# EAGLE board bat_mini3 (EAGLE 9.0.0)
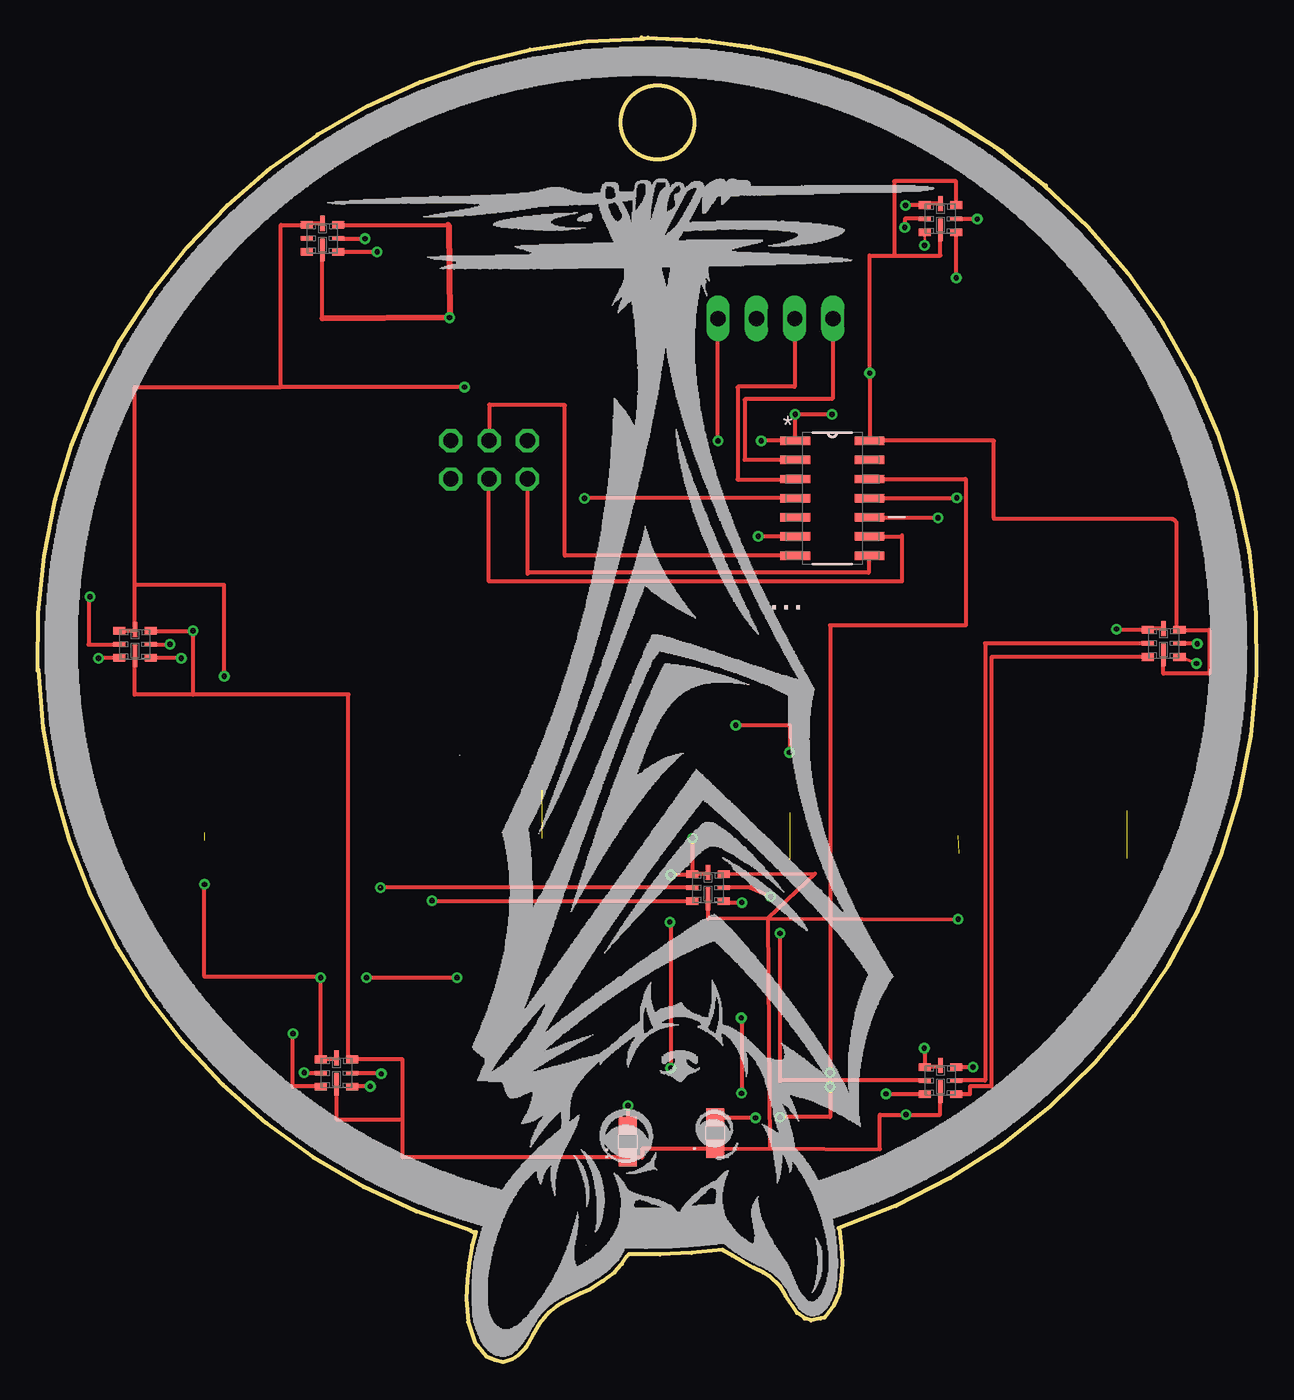
[diagram p0: board, top side]
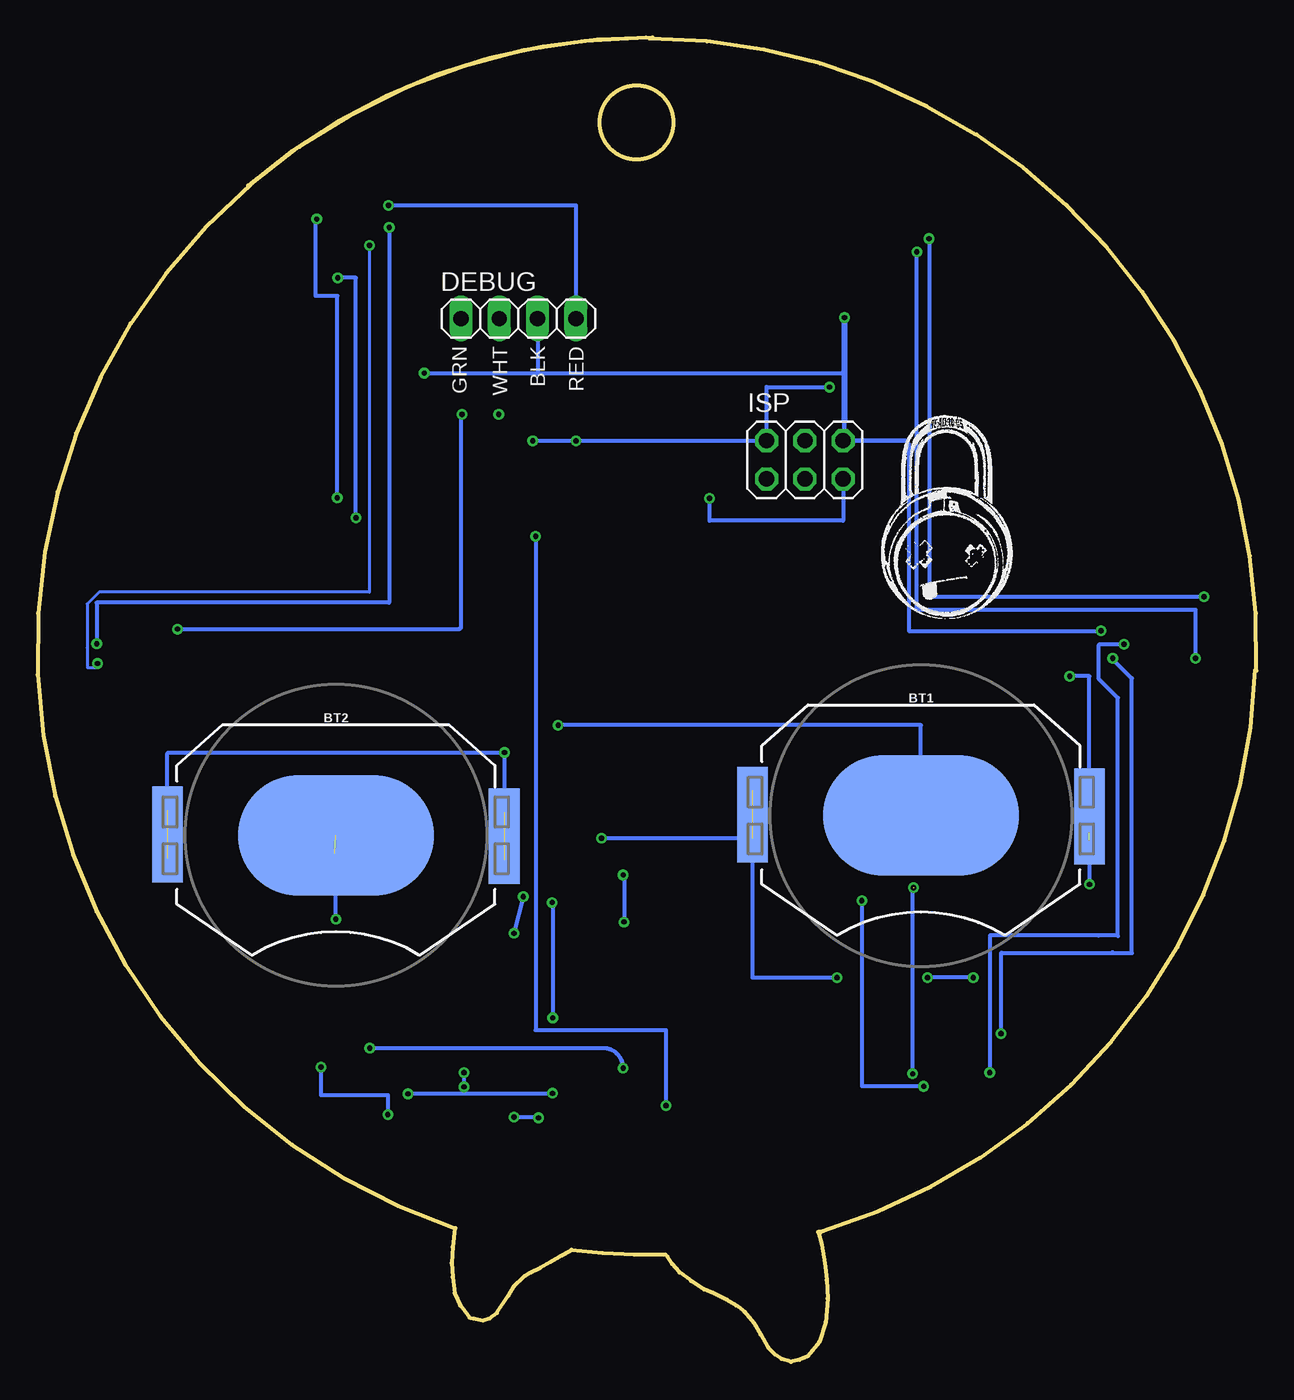
[diagram p1: board, bottom side, seen from below]

Size 80.84 x 87.88 mm. Coordinates in mm from the lower left corner, seen from the top.
Outline: 40.5,87.88 arc-161 53.12,8.88
Outline: 40.06,87.88 arc-41 66.88,78.06
Outline: 0,45.88 arc-92 40.25,87.81
Outline: 28.75,8.69 arc-71 0.06,45.94
Outline: 45.44,7.44 arc-9 39.19,7.13
Outline: 28.88,8.63 29.06,8.63 28.81,7.75 28.62,6.56 28.5,5.44 28.44,4.19 28.56,2.63 29,1.31 29.75,0.38 30.31,0.13 30.88,0 31.5,0.19 31.94,0.5 32.38,0.94 32.88,1.81 33.31,2.56 33.94,3.31 34.5,3.75 35.12,4.13 36,4.56 36.62,4.81 37.5,5.38 38.25,5.94 38.75,6.5 39.06,7
Outline: 53.19,8.88 53.31,7.63 53.38,6.56 53.31,5.63 53.19,4.56 52.81,3.75 52.19,2.94 51.94,2.88 51.31,2.75 50.88,2.88 50.38,3.25 49.62,4.38 49.25,5 48.56,5.69 48.12,5.94 47.5,6.25 46.81,6.63 46.06,7.06 45.5,7.38
Outline: circle at 41.12,82.25 radius 2.44
Copper layers (1*16): Top 0.0356mm / dielectric 1.5011mm / Bottom 0.0356mm
Design rules "osh": minimum track width 6mil, minimum drill 13mil, track to track 6mil, track to pad 6mil, pad to pad 6mil, via to via 6mil, smd to smd 6mil, copper to edge 15mil, drill to drill 6mil, minimum pad ring 7mil, minimum via ring 7mil, stop-mask expansion 4mil, vias tented up to drill 0mil, thermal gap 10mil

## Footprints (pad centres in the part's own frame; a part is rotated, then mirrored left to right if it is on the bottom)
CHIP-LED0805 = smd 1.2 x 1.2: A 0,-1.05; C 0,1.05
SOIC127P600X175-14N = smd 1.981 x 0.559: 1 -2.464,3.81; 2 -2.464,2.54; 3 -2.464,1.27; 4 -2.464,0; 5 -2.464,-1.27; 6 -2.464,-2.54; 7 -2.464,-3.81; 8 2.464,-3.81; 9 2.464,-2.54; 10 2.464,-1.27; 11 2.464,0; 12 2.464,1.27; 13 2.464,2.54; 14 2.464,3.81
BATTCON_20MM_4LEGS = smd 13 x 8: NEGATIVE 0,0 | smd 2.032 x 3.175: POSITIVE@1 -11.176,1.651; POSITIVE@2 -11.176,-1.524; POSITIVE@3 11.176,1.524; POSITIVE@4 11.176,-1.651
1X04 = drill 1.016 long: 1 -3.81,0; 2 -1.27,0; 3 1.27,0; 4 3.81,0
2X03 = drill 1.016 octagon: 1 -2.54,-1.27; 2 -2.54,1.27; 3 0,-1.27; 4 0,1.27; 5 2.54,-1.27; 6 2.54,1.27
APA102-2020 = smd 0.8 x 0.5: 1_VDD -1.05,0.9; 3_SDO -1.05,-0.9; 4_SDI 1.05,-0.9; 6_GND 1.05,0.9 | smd 0.8 x 0.3: 2_CKO -1.05,0; 5_CKI 1.05,0 | smd 0.3 x 1.5: GNDPAD 0,-0.75 | smd 0.3 x 1: VDDPAD 0,1

## Placement (x,y rotation side)
.  .  [CHIP-LED0805]  44.95,15.17 0 top
..  ..  [CHIP-LED0805]  39.13,14.61 0 top
...  ATTINY84-20SSU  [SOIC127P600X175-14N]  52.72,57.31 0 top
BT1  [BATTCON_20MM_4LEGS]  22.25,36.25 0 bottom
BT2  [BATTCON_20MM_4LEGS]  61.06,34.94 0 bottom
DEBUG  [1X04]  48.95,69.23 0 bottom
ISP  .  [2X03]  29.95,59.86 0 bottom
ONE  APA102  [APA102-2020]  59.88,75.86 0 top
THREE  APA102  [APA102-2020]  59.88,18.67 0 top
TWO  APA102  [APA102-2020]  74.7,47.67 0 top
U$5  APA102  [APA102-2020]  44.47,31.47 0 top
U$6  APA102  [APA102-2020]  19.82,19.17 0 top
U$7  APA102  [APA102-2020]  6.45,47.61 0 top
U$8  APA102  [APA102-2020]  18.89,74.55 0 top

## Library data of the parts
. .. = led
... = Atmel_By_element14_Batch_1-00; OC_FARNELL: 1636955; OC_NEWARK: 03P2040; PACKAGE: SOIC-14; SUPPLIER: Atmel
BT1 BT2 = SF_Batteries; PROD_ID: BATT-10373; SF_SKU: PRT-11892
DEBUG ISP = pinhead
ONE THREE TWO U$5-U$8 = pimoroni-optoelectronics

## Nets
GND: ....14 ...A ..A BT2.NEGATIVE DEBUG.3 ISP.6 ONE.6_GND ONE.GNDPAD THREE.6_GND THREE.GNDPAD TWO.6_GND TWO.GNDPAD U$5.6_GND U$5.GNDPAD U$6.6_GND U$6.GNDPAD U$7.6_GND U$7.GNDPAD U$8.6_GND U$8.GNDPAD
N$1: ....2 DEBUG.1
N$3: ....8 ISP.1
N$4: ....7 ISP.4
N$5: ....9 ISP.3
N$6: ....4 ISP.5
N$7: ....12 ..C
N$8: ....6 ...C
N$9: ....11 ONE.5_CKI
N$10: ....10 ONE.4_SDI
N$11: ONE.3_SDO TWO.4_SDI
N$12: ONE.2_CKO TWO.5_CKI
N$13: THREE.4_SDI TWO.3_SDO
N$14: THREE.5_CKI TWO.2_CKO
N$15: ....3 DEBUG.2
N$16: THREE.3_SDO U$5.4_SDI
N$17: THREE.2_CKO U$5.5_CKI
N$18: U$5.3_SDO U$6.4_SDI
N$19: U$5.2_CKO U$6.5_CKI
N$20: U$6.2_CKO U$7.5_CKI
N$21: U$6.3_SDO U$7.4_SDI
N$22: U$7.3_SDO U$8.4_SDI
N$23: U$7.2_CKO U$8.5_CKI
N$24: BT1.NEGATIVE BT2.POSITIVE@1 BT2.POSITIVE@2 BT2.POSITIVE@3 BT2.POSITIVE@4
VCC: ....1 BT1.POSITIVE@1 BT1.POSITIVE@2 BT1.POSITIVE@3 BT1.POSITIVE@4 DEBUG.4 ISP.2 ONE.1_VDD ONE.VDDPAD THREE.1_VDD THREE.VDDPAD TWO.1_VDD TWO.VDDPAD U$5.1_VDD U$5.VDDPAD U$6.1_VDD U$6.VDDPAD U$7.1_VDD U$7.VDDPAD U$8.1_VDD U$8.VDDPAD

## Tracks (layer width: path | path; a pad name or v marks a point on that pad's centre or on a via)
GND  (via drill 0.35)  (1 unrouted)
  Top 0.254: 18.89,69.23 U$8.GNDPAD | U$8.6_GND 27.23,75.45 | 55.18,65.6 v55.2,65.61 | v55.2,65.61 55.2,73.42 56.81,73.42 | 56.81,73.42 59.88,73.42 ONE.GNDPAD | ONE.6_GND 60.94,78.34 56.81,78.34 56.81,73.42 | TWO.GNDPAD 74.68,46.92 74.68,45.67 77.7,45.67 77.7,48.57 TWO.6_GND arc-90 75.56,48.76 75.56,55.56 arc90 75.19,55.94 63.5,55.94 arc-90 63.44,56 63.44,61.13 arc-90 63.44,61.12 ....14 55.18,65.6 | 24.21,16.1 24.21,13.56 ...A 40.09,13.54 40.09,14.12 ..A 48.55,14.18 | 24.21,16.1 24.21,20.07 U$6.6_GND U$6.6_GND arc-90 20.61,20.33 20.61,44.3 arc-90 20.59,44.28 10.3,44.28 | U$6.GNDPAD 19.82,16.1 24.21,16.1 | U$7.6_GND v10.3,48.51 10.3,44.28 | 10.3,44.28 6.43,44.28 6.43,46.86 U$7.GNDPAD | U$5.6_GND 51.57,32.41 48.45,29.43 | 48.45,29.43 44.47,29.4 U$5.GNDPAD | 48.55,14.18 55.87,14.1 55.87,16.4 v57.61,16.4 59.87,16.4 THREE.GNDPAD | 48.45,29.43 48.55,14.18 | THREE.6_GND v62.05,19.56 | v55.2,65.61 arc90 55.18,65.6 | 48.45,29.43 61.05,29.36 v61.06,29.38
  Top 0.406: 27.23,75.45 27.26,75.42 v27.32,69.3 18.89,69.23
  Bottom 0.254: 47.68,65.63 47.7,65.61 27.51,65.61 27.32,65.8 | v55.2,65.61 55.18,65.63 47.68,65.63 | v10.3,48.51 v10.31,48.5 23.04,48.5 23.04,60.88 23.29,61.13 | DEBUG.3 47.68,65.63 | v62.05,19.56 62.05,17.7 57.61,17.7 v57.61,16.4 | v61.06,29.38 61.06,33.69 61.12,33.75
  Bottom 0.305: 27.32,62.48 27.32,61.13 ISP.6 23.29,61.13
  Bottom 0.406: v27.32,69.3 27.32,65.8 27.32,62.48
N$1
  Top 0.254: DEBUG.1 52.76,63.97 52.69,63.9 46.95,63.9 46.89,63.84 46.89,59.86 50.25,59.86 ....2
N$2
  Top 0.254: 55.17,65.62 55.21,65.66
N$3
  Top 0.254: ....8 55.12,53.5 55.12,52.37 32.5,52.37 | 32.5,52.37 32.5,52.3 | 32.5,52.37 32.5,58.59 ISP.1
N$4
  Top 0.254: ....7 34.97,53.5 34.97,63.48 29.96,63.48 | 29.96,63.48 29.96,63.55 | 29.96,63.48 29.96,61.13 ISP.4
N$5
  Top 0.254: ....9 57.33,54.77 | 57.33,54.77 57.33,54.84 | 57.33,54.77 57.33,51.78 29.93,51.78 29.93,58.59 ISP.3
N$6  (via drill 0.35)
  Top 0.254: ....4 v36.27,57.31
  Bottom 0.254: v36.27,57.31 36.27,55.81 27.41,55.81 ISP.5
N$7  (via drill 0.35)
  Top 0.254: ....12 61.56,58.58 61.56,48.88 52.56,48.88 v52.56,19.19 | v52.56,18.25 52.56,16.25 v49.25,16.25 | v47.62,16.19 44.95,16.19 ..C
  Bottom 0.254: v52.56,19.19 v52.56,18.25 | v49.25,16.25 47.62,16.25 v47.62,16.19
N$8  (via drill 0.35)
  Top 0.254: ....6 v47.8,54.77 | v39.16,17.01 39.16,15.66 ...C
  Bottom 0.254: v47.8,54.77 47.8,22.02 39.16,22.02 v39.16,17.01
N$9  (via drill 0.35)
  Top 0.254: ....11 60.97,57.31 v60.97,57.34 | v62.33,75.83 60.94,75.83 ONE.5_CKI
  Bottom 0.254: v60.97,57.34 60.97,70.73 62.4,70.73 62.4,75.83 v62.33,75.83
N$10  (via drill 0.35)
  Top 0.254: ....10 59.73,56.04 v59.73,56.01 | v60.94,71.94 ONE.4_SDI
  Bottom 0.254: v59.73,56.01 59.73,71.94 v60.94,71.94 60.97,71.94
N$11  (via drill 0.35)
  Top 0.152: ONE.3_SDO v58.84,74.08 v58.83,74.08
  Top 0.203: v76.87,46.34 TWO.4_SDI
  Bottom 0.203: v58.83,74.08 58.83,51.08 76.77,51.08 77.56,50.29 77.56,47.4 77.55,47.39 77.55,46.06 76.87,46.06 v76.87,46.34
N$12  (via drill 0.35)
  Top 0.254: ONE.2_CKO 57.52,75.86 v57.52,75.28 | v76.92,47.66 TWO.5_CKI
  Bottom 0.254: v57.52,75.28 57.52,50.39 76.92,50.39 v76.92,47.66
N$13
  Top 0.254: TWO.3_SDO 63.26,46.77 63.26,18.27 61.84,18.27 61.84,17.76 60.94,17.76 THREE.4_SDI
N$14
  Top 0.254: TWO.2_CKO 62.85,47.67 62.85,18.67 THREE.5_CKI
N$15
  Top 0.254: DEBUG.2 50.22,64.73 50.19,64.7 46.45,64.7 46.43,64.68 46.43,58.56 50.24,58.56 ....3
N$16  (via drill 0.35)
  Top 0.254: U$5.4_SDI arc90 45.6,30.48 v46.71,30.48 | v46.67,22.82 arc-90 46.69,22.8 v46.69,17.82 | v56.27,17.78 arc90 v56.28,17.77 THREE.3_SDO
  Bottom 0.254: v46.71,30.48 arc90 46.67,30.44 v46.67,22.82 | v46.69,17.82 arc90 46.73,17.78 v56.27,17.78
N$17  (via drill 0.35)
  Top 0.254: THREE.2_CKO 49.3,18.67 49.25,18.63 v49.25,28.44 | U$5.5_CKI arc-90 45.55,31.5 47.19,31.5 | 47.19,31.5 47.31,31.5 | 47.19,31.5 v48.62,30.88
  Bottom 0.254: v48.62,30.88 v49.25,28.44
N$18  (via drill 0.35)
  Top 0.254: v22.07,18.28 U$6.4_SDI | U$5.3_SDO 26.2,30.57 v26.17,30.6
  Bottom 0.254: v26.17,30.6 26.17,18.32 26.15,18.3 22.09,18.3 v22.07,18.28
N$19  (via drill 0.35)  (1 unrouted)
  Top 0.254: U$6.5_CKI 22.7,19.17 v22.8,19.11 | U$5.2_CKO 22.7,31.47 22.69,31.48
  Bottom 0.254: v22.8,19.11 22.8,31.42 v22.75,31.47
N$20  (via drill 0.35)
  Top 0.254: U$7.5_CKI 8.76,47.61 v8.77,47.63 | v17.68,19.19 17.69,19.17 U$6.2_CKO
  Bottom 0.254: v8.77,47.63 10.4,47.63 10.44,47.59 10.44,45.31 9.19,44.06 9.19,28.25 9.26,28.32 10.43,28.32 10.46,28.29 17.68,28.29 v17.68,19.19
N$21  (via drill 0.35)
  Top 0.254: U$6.3_SDO 16.96,18.27 16.93,18.25 v16.93,21.79 | v9.52,46.68 9.49,46.71 U$7.4_SDI
  Bottom 0.254: v16.93,21.79 16.93,27.12 16.9,27.15 9.59,27.15 | 9.59,27.15 9.55,27.18 | v9.52,46.68 9.55,46.65 8.25,45.35 8.25,27.13 8.28,27.15 9.59,27.15
N$22  (via drill 0.35)
  Top 0.254: U$7.3_SDO 4.03,46.71 v4.03,46.68 | v22.52,73.66 U$8.4_SDI
  Bottom 0.254: v4.03,46.68 4.03,49.9 22.52,49.9 v22.52,73.66
N$23  (via drill 0.35)
  Top 0.254: U$8.5_CKI 19.93,74.53 v21.71,74.53 | v3.47,50.78 3.38,50.78 3.38,47.61 | 3.38,47.59 3.38,47.61 | 3.38,47.61 U$7.2_CKO
  Bottom 0.254: v21.71,74.53 21.71,50.78 v3.47,50.78
N$24  (via drill 0.35)  (2 unrouted)
  Top 0.254: v46.31,42.25 49.88,42.25 v49.88,40.44
  Bottom 0.254: BT2.POSITIVE@1 72.24,40.39 72.19,40.44 v49.88,40.44 BT2.POSITIVE@4 | BT1.NEGATIVE 22.25,42.25 v46.31,42.25
VCC  (via drill 0.35)  (2 unrouted)
  Top 0.254: ONE.VDDPAD 58.84,76.86 ONE.1_VDD 57.56,76.76 v57.56,76.75 | v48,61.13 v48,61.12 ....1 v50.26,62.87 arc90 v50.25,62.88 v52.69,62.88 | v45.12,61.13 DEBUG.4 | U$8.VDDPAD 17.84,75.55 U$8.1_VDD 16.12,75.45 16.12,64.69 | v28.31,64.69 16.12,64.69 | U$7.1_VDD 6.45,48.51 U$7.VDDPAD 6.45,51.56 | 6.45,51.56 6.45,64.69 16.12,64.69 | v12.38,45.5 12.38,51.56 6.45,51.56 | U$5.VDDPAD 44.47,32.37 43.44,32.37 | 43.44,32.37 U$5.1_VDD arc-90 43.36,32.31 v42,32.31 | v43.44,34.75 43.44,32.37 | U$6.VDDPAD 19.82,20.07 U$6.1_VDD v18.77,25.5 18.77,25.56 11.06,25.56 v11.06,31.69 | v21.81,25.5 v27.81,25.5 | THREE.VDDPAD arc-90 59.78,19.57 THREE.1_VDD 58.84,20.79 arc90 v58.81,20.81 | v41.94,29.19 arc-90 42,29.13 v42,19.5 | v71.56,48.63 arc90 71.61,48.57 TWO.1_VDD arc-90 73.75,48.67 TWO.VDDPAD
  Bottom 0.254: v57.56,76.75 45.14,76.75 DEBUG.4 | v48,61.13 v45.12,61.13 ISP.2 32.49,64.69 v28.31,64.69 | v12.38,45.5 11.07,45.5 BT1.POSITIVE@3 11.07,35.13 11.06,35.13 v11.06,31.69 | BT1.POSITIVE@2 43.44,34.73 v43.44,34.75 | BT1.POSITIVE@1 33.43,25.5 v27.81,25.5 27.69,25.5 27.69,25.56 | v18.77,25.5 v21.81,25.5 | v42,32.31 arc90 41.94,32.25 v41.94,29.19 | v42,19.5 arc-90 43.31,20.81 v58.81,20.81 | v71.56,48.63 52.94,48.63 arc-90 52.75,48.81 52.75,62.81 arc90 v52.69,62.88

## Text on the board
bPlace: RED | BLK | GRN | WHT